# Altium PCB mounting_pcb.PcbDoc (part 2 of 2)
Units mm, origin at the board's own origin, x right, y up, seen from the top; angles counter-clockwise.
Board outline 80 x 80 mm, 2 copper layers (Top Layer, Bottom Layer), stack 0.141 mm thick; 75 components, 159 nets, 340 pads, 197 vias.
Unrouted connection lines stored in the file: 1.
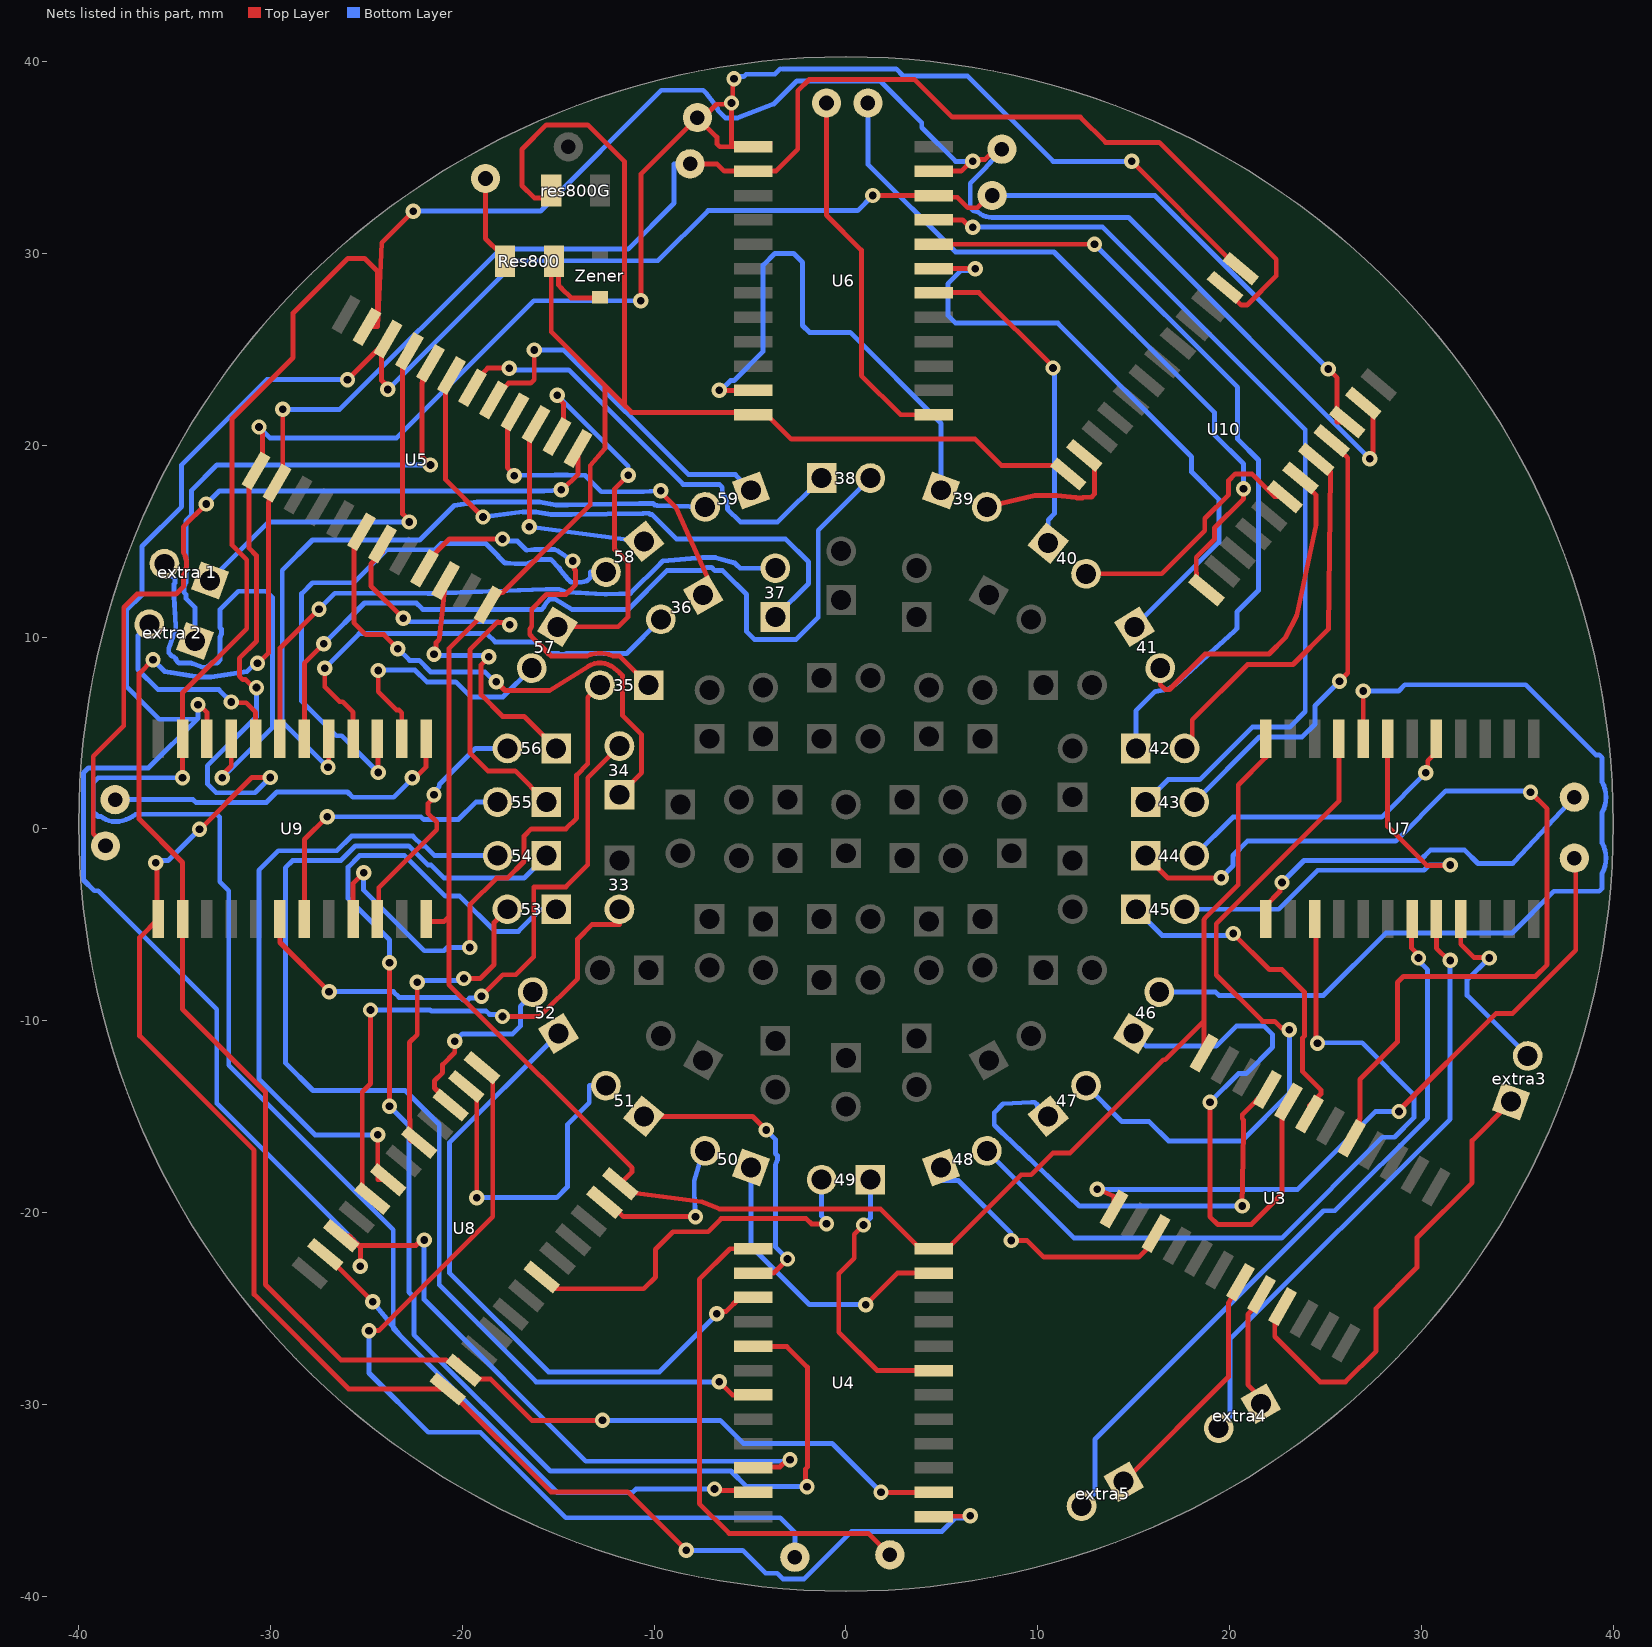
[diagram p2: the nets of this part, all layers, seen from the top]

## Via types
v1: diameter 0.8, hole 0.4, Top Layer to Bottom Layer, 197 vias

## Nets (pads, with @x,y where several pads share a name; then routed paths per layer and width w, separated by ;. In a path a pad name is that pad's centre, name@x,y a point inside that pad or via, vN(x,y) a via of type N, cw(c..) or ccw(c..) an arc to the next point about the centre after c; other vN are vias at no path point) (continued)
Net33_2: 33.2 U8.8 | length 31.6
  Top Layer w0.254: v1(-24.79,-9.442) -24.79,-13.284 -25.222,-13.716 -25.222,-18.734 U8.8@-24.69,-19.266 ; v1(-17.907,-9.779) -15.962,-9.779 -13.995,-7.812 -13.995,-5.74 -13.233,-4.978 ; 33.2@-11.811,-4.191 -11.811,-4.978 ; -13.233,-4.978 -11.811,-4.978 ; -13.233,-4.978 -11.811,-4.978 ; -13.233,-4.978 -11.811,-4.978 ; -13.233,-4.978 -11.811,-4.978
  Bottom Layer w0.254: v1(-24.79,-9.442) -21.677,-9.442 -21.619,-9.5 -18.758,-9.5 -18.583,-9.675 -18.011,-9.675 v1(-17.907,-9.779)
Net34_1: 34.1 U5.18 | length 45.3
  Top Layer w0.254: U5.18@-25.268,15.494 -25.654,15.108 -25.654,10.749 -25.031,10.126 -24.096,10.126 v1(-23.368,9.398) ; v1(-18.237,7.671) -17.78,7.214 -15.548,7.214 -15.443,7.214 ; 34.1@-11.811,1.778 -10.655,2.934 -10.655,4.915 -11.659,5.918 -11.659,8.001 -11.807,8.15 -12.09,8.384 ; -15.443,7.214 -13.442,8.472 ; -15.443,7.214 -13.442,8.472 ; -15.443,7.214 -13.442,8.472 ; -15.443,7.214 -13.442,8.472 ; -13.442,8.472 cw(c-12.827,7.493) -12.09,8.384 ; -13.442,8.472 cw(c-12.827,7.493) -12.09,8.384 ; -13.442,8.472 cw(c-12.827,7.493) -12.09,8.384 ; -13.442,8.472 cw(c-12.827,7.493) -12.09,8.384 ; -13.442,8.472 cw(c-12.827,7.493) -12.09,8.384 ; -13.442,8.472 cw(c-12.827,7.493) -12.09,8.384 ; -13.442,8.472 cw(c-12.827,7.493) -12.09,8.384 ; -13.442,8.472 cw(c-12.827,7.493) -12.09,8.384
  Bottom Layer w0.254: v1(-23.368,9.398) -22.752,8.782 -22.258,8.782 -21.661,8.185 -18.827,8.185 -18.313,7.671 v1(-18.237,7.671)
Net34_2: 34.2 U9.18 | length 30.5
  Top Layer w0.254: U9.18@-29.51,-4.7 -29.51,-5.923 v1(-26.949,-8.484) ; v1(-19.006,-8.719) -17.89,-7.603 -17.21,-7.603 -16.281,-6.674 -16.281,-3.023 -14.605,-3.023 -13.462,-1.88 -13.462,2.667 34.2@-11.811,4.318
  Bottom Layer w0.254: v1(-26.949,-8.484) -23.599,-8.484 -23.301,-8.782 -20.098,-8.782 -19.945,-8.934 -19.735,-8.934 -19.624,-8.823 -19.11,-8.823 v1(-19.006,-8.719)
Net35_1: 35.1 U5.21 | length 38
  Top Layer w0.254: U5.21@-21.968,13.589 -21.968,13.823 -20.679,15.113 v1(-17.907,15.113) ; v1(-14.252,13.965) -14.148,13.86 -14.148,13.513 -14.097,13.462 -14.097,12.725 -14.605,12.217 -15.621,12.217 -16.383,11.455 -16.383,10.563 -16.486,10.399 -16.486,10.132 -16.423,10.069 -16.383,10.029 -16.383,10.017 -15.458,9.091 -15.383,9.017 ; 35.1@-10.287,7.493 -11.737,8.943 -11.811,9.017 ; -15.383,9.017 -13.495,9.017 ; -15.383,9.017 -13.495,9.017 ; -15.383,9.017 -13.495,9.017 ; -15.383,9.017 -13.495,9.017 ; -13.495,9.017 cw(c-12.827,7.493) -12.159,9.017 ; -13.495,9.017 cw(c-12.827,7.493) -12.159,9.017 ; -13.495,9.017 cw(c-12.827,7.493) -12.159,9.017 ; -13.495,9.017 cw(c-12.827,7.493) -12.159,9.017 ; -13.495,9.017 cw(c-12.827,7.493) -12.159,9.017 ; -13.495,9.017 cw(c-12.827,7.493) -12.159,9.017 ; -13.495,9.017 cw(c-12.827,7.493) -12.159,9.017 ; -13.495,9.017 cw(c-12.827,7.493) -12.159,9.017 ; -12.159,9.017 -11.811,9.017 ; -12.159,9.017 -11.811,9.017 ; -12.159,9.017 -11.811,9.017 ; -12.159,9.017 -11.811,9.017
  Bottom Layer w0.254: v1(-17.907,15.113) -17.803,15.009 -17.135,15.009 -16.737,14.61 -16.655,14.529 -16.63,14.529 -16.255,14.56 -15.187,14.56 -15.01,14.491 v1(-14.252,13.965)
Net35_2: 35.2 U9.21 | length 28.3
  Top Layer w0.254: U9.21@-25.7,-4.7 -25.7,-2.84 v1(-25.146,-2.286) ; v1(-19.609,-6.185) -19.609,-3.962 -18.212,-2.565 -17.653,-2.565 -16.789,-1.702 -16.789,-0.381 -16.408,0 -14.605,0 -14.046,0.559 -14.046,2.801 -13.462,3.385 -13.462,6.858 35.2@-12.827,7.493
  Bottom Layer w0.254: v1(-25.146,-2.286) -25.146,-3.2 -21.99,-6.356 -20.959,-6.356 -20.788,-6.185 v1(-19.609,-6.185)
Net36_1: 36.1 U5.4 | length 17.8
  Top Layer w0.254: v1(-17.291,18.415) -17.291,18.475 -17.653,18.837 -17.653,21.345 U5.4@-17.268,21.73 ; v1(-9.652,17.632) -9.652,17.551 -8.951,16.851 -8.877,16.776 -7.215,13.077 36.1@-7.452,12.192
  Bottom Layer w0.254: v1(-17.291,18.415) -17.272,18.415 -15.163,18.453 -14.517,18.453 -13.589,18.415 -13.515,18.341 -12.751,17.577 -10.56,17.577 v1(-9.652,17.632)
Net36_2: 36.2 U9.4 | length 40.4
  Top Layer w0.254: v1(-27.178,8.382) -27.178,7.405 -26.399,6.625 -26.244,6.625 -25.7,6.081 U9.4@-25.7,4.7
  Bottom Layer w0.254: v1(-27.178,8.382) -25.381,10.179 -18.727,10.179 -18.295,9.747 -16.113,9.747 -15.585,9.218 -15.51,9.144 -14.991,9.144 -14.9,9.087 -14.633,9.087 -14.576,9.144 ; 36.2@-9.652,10.922 -11.43,9.144 ; -14.576,9.144 -13.035,9.144 ; -14.576,9.144 -13.035,9.144 ; -14.576,9.144 -13.035,9.144 ; -14.576,9.144 -13.035,9.144 ; -14.576,9.144 -13.035,9.144 ; -14.576,9.144 -13.035,9.144 ; -13.035,9.144 cw(c-12.827,7.493) -12.619,9.144 ; -13.035,9.144 cw(c-12.827,7.493) -12.619,9.144 ; -13.035,9.144 cw(c-12.827,7.493) -12.619,9.144 ; -13.035,9.144 cw(c-12.827,7.493) -12.619,9.144 ; -13.035,9.144 cw(c-12.827,7.493) -12.619,9.144 ; -13.035,9.144 cw(c-12.827,7.493) -12.619,9.144 ; -13.035,9.144 cw(c-12.827,7.493) -12.619,9.144 ; -13.035,9.144 cw(c-12.827,7.493) -12.619,9.144 ; -12.619,9.144 -11.43,9.144 ; -12.619,9.144 -11.43,9.144 ; -12.619,9.144 -11.43,9.144 ; -12.619,9.144 -11.43,9.144 ; -12.619,9.144 -11.43,9.144 ; -12.619,9.144 -11.43,9.144
Net37_1: 37.1 U5.7 | length 30
  Top Layer w0.254: U5.7@-20.568,23.635 -20.885,23.318 -20.885,18.218 v1(-18.923,16.256)
  Bottom Layer w0.254: v1(-18.923,16.256) -16.833,16.529 -16.187,16.529 -16.164,16.525 -15.37,16.383 -14.306,16.383 -10.583,16.44 -10.561,16.457 -10.269,16.457 -10.195,16.383 -10.109,16.383 -8.846,15.12 -3.157,15.12 -1.956,13.919 -1.956,12.776 37.1@-3.683,11.049
Net37_2: 37.2 U9.7 | length 32.6
  Top Layer w0.254: U9.7@-29.51,4.7 -29.51,9.423 v1(-27.478,11.455)
  Bottom Layer w0.254: v1(-27.478,11.455) -26.65,12.283 -21.806,12.283 -21.797,12.274 -21.587,12.274 -15.655,12.49 -15.652,12.493 -14.964,12.493 -14.631,12.351 -12.579,12.233 ccw(c-12.515,13.388) -12.475,12.232 -11.241,12.274 -9.663,13.853 -9.546,13.97 -7.481,14.14 -6.8,14.14 -5.788,13.856 -5.714,13.782 -5.521,13.589 37.2@-3.683,13.589
Net38_1: 38.1 U5.6 | length 30.3
  Top Layer w0.254: U5.6@-19.468,23 -19.468,23.24 -18.686,24.022 v1(-17.551,24.022)
  Bottom Layer w0.254: v1(-17.551,24.022) -17.456,23.927 -14.46,23.927 -8.491,17.958 -6.6,17.958 -6.526,17.883 -6.452,17.809 ; 38.1@-1.27,18.288 -3.556,16.002 -5.512,16.002 -6.184,16.674 ; -6.452,17.524 cw(c-7.34,16.784) -6.184,16.779 ; -6.452,17.524 cw(c-7.34,16.784) -6.184,16.779 ; -6.452,17.524 cw(c-7.34,16.784) -6.184,16.779 ; -6.452,17.524 cw(c-7.34,16.784) -6.184,16.779 ; -6.452,17.524 cw(c-7.34,16.784) -6.184,16.779 ; -6.452,17.524 cw(c-7.34,16.784) -6.184,16.779 ; -6.452,17.524 cw(c-7.34,16.784) -6.184,16.779 ; -6.452,17.524 cw(c-7.34,16.784) -6.184,16.779 ; -6.452,17.524 -6.452,17.809 ; -6.452,17.524 -6.452,17.809 ; -6.452,17.524 -6.452,17.809 ; -6.452,17.524 -6.452,17.809 ; -6.184,16.674 -6.184,16.779 ; -6.184,16.674 -6.184,16.779 ; -6.184,16.674 -6.184,16.779 ; -6.184,16.674 -6.184,16.779
Net38_2: 38.2 U9.6 | length 45
  Top Layer w0.254: U9.6@-28.24,4.7 -28.24,8.636 v1(-27.224,9.652)
  Bottom Layer w0.254: v1(-27.224,9.652) -25.101,11.775 -22.397,11.775 -22.126,11.504 -22.052,11.43 -15.877,11.43 -15.782,11.525 -15.584,11.843 -15.441,11.985 -15.174,11.985 -14.286,11.43 -11.367,11.43 -9.335,13.462 -7.564,13.462 -7.27,13.632 -7.011,13.632 -6.841,13.462 -6.426,13.462 -6.352,13.388 -5.182,12.217 -5.182,10.287 -4.775,9.881 -2.591,9.881 -1.448,11.024 -1.448,15.57 38.2@1.27,18.288
Net39_1: 39.1 U6.23 | length 28
  Top Layer w0.254: v1(-6.604,22.86) U6.23@-4.827,22.86
  Bottom Layer w0.254: v1(-6.604,22.86) -6.53,22.86 -6.015,23.375 -5.835,23.375 -4.318,24.892 -4.318,29.388 -3.708,29.997 -2.731,29.997 -2.267,29.533 -2.267,26.245 -1.905,25.883 0.214,25.883 4.953,21.143 39.1@4.953,17.653
Net39_2: 39.2 U10.23 | length 8.2
  Top Layer w0.254: 39.2@7.34,16.784 39.2@7.925,16.784 ; U10.23@12.411,19.471 12.947,18.935 12.947,17.448 12.799,17.299 12.353,17.272 12.326,17.245 12.029,17.245 11.997,17.272 10.982,17.383 9.848,17.383 8.074,16.964 39.2@7.925,16.815 ; 39.2@7.925,16.784 39.2@7.925,16.815 ; 39.2@7.925,16.784 39.2@7.925,16.815 ; 39.2@7.925,16.784 39.2@7.925,16.815 ; 39.2@7.925,16.784 39.2@7.925,16.815
Net40_1: 40.1 U6.6 | length 17.2
  Top Layer w0.254: U6.6@4.573,27.94 4.592,27.959 6.187,27.959 6.927,27.959 10.795,24.091 v1(10.795,24.028)
  Bottom Layer w0.254: 40.1@10.541,14.896 10.541,16.104 10.865,16.427 10.865,23.959 v1(10.795,24.028)
Net40_2: 40.2 U10.6 | length 13.8
  Top Layer w0.254: 40.2@12.515,13.298 16.452,13.298 18.703,15.549 18.703,16.179 19.945,17.421 19.945,18.161 20.294,18.51 21.158,18.51 22.348,17.32 U10.6@22.877,17.32
Net41_1: 41.1 U6.7 | length 32.6
  Top Layer w0.254: U6.7@4.573,29.21 v1(6.731,29.21)
  Bottom Layer w0.254: v1(6.731,29.21) 6.627,29.106 5.992,29.106 5.309,28.423 5.309,26.772 5.715,26.365 11.049,26.365 18.012,19.402 18.012,18.609 19.437,17.184 19.437,14.936 41.1@15.037,10.536
Net41_2: 41.2 U10.7 | length 17.5
  Top Layer w0.254: 41.2@16.383,8.382 16.383,7.518 16.637,7.264 16.866,7.264 18.72,9.119 22.055,9.119 22.896,9.959 23.495,11.118 24.511,15.875 24.511,17.399 23.694,18.216 U10.7@23.694,18.293
Net42_1: 42.1 U6.8 | length 41.3
  Top Layer w0.254: U6.8@4.573,30.48 v1(12.954,30.48)
  Bottom Layer w0.254: v1(12.954,30.48) 20.419,23.015 20.419,20.32 21.507,19.231 21.507,12.433 20.38,11.305 20.38,10.447 20.231,10.299 17.158,7.524 cw(c16.383,8.382) 16.571,7.241 16.129,7.168 16.055,7.094 15.113,6.152 42.1@15.113,4.191
Net42_2: 42.2 U10.8 | length 19.9
  Top Layer w0.254: 42.2@17.653,4.191 18.053,4.591 18.053,5.684 20.939,8.57 23.302,8.57 25.146,10.414 25.269,18.509 25.269,18.616 25.186,18.699 25.178,18.706 U10.8@24.51,19.266
Net43_1: 43.1 U6.9 | length 48.9
  Top Layer w0.254: U6.9@4.573,31.75 6.075,31.75 6.456,31.369 v1(6.604,31.369)
  Bottom Layer w0.254: v1(6.604,31.369) 13.386,31.369 13.46,31.295 23.941,20.814 23.941,6.121 23.128,5.309 21.184,5.309 18.44,2.565 16.789,2.565 43.1@15.621,1.397
Net43_2: 43.2 U10.9 | length 23.8
  Top Layer w0.254: U10.9@25.326,20.239 25.326,20.18 26.162,19.345 26.162,8.128 v1(25.73,7.696)
  Bottom Layer w0.254: 43.2@18.161,1.397 21.559,4.795 23.783,4.795 24.449,5.461 24.449,6.415 v1(25.73,7.696)
Net44_1: 44.1 U3.17 | length 49.4
  Top Layer w0.254: 44.1@15.621,-1.397 16.789,-2.565 19.533,-2.565 v1(19.558,-2.54) ; U3.17@26.368,-16.129 26.775,-15.722 26.775,-15.126 26.797,-15.104 26.797,-13.058 28.753,-11.102 28.753,-8.001 29.058,-7.696 35.941,-7.696 36.551,-7.087 36.551,1.041 v1(35.687,1.905)
  Bottom Layer w0.254: v1(19.558,-2.54) 20.179,-1.919 20.179,-1.386 20.93,-0.635 28.651,-0.635 31.267,1.981 35.611,1.981 v1(35.687,1.905)
Net44_2: 44.2 U7.17 | length 15.9
  Top Layer w0.254: v1(30.226,2.921) 30.33,3.025 30.33,3.55 30.78,4 U7.17@30.78,4.7
  Bottom Layer w0.254: 44.2@18.161,-1.397 20.174,0.616 27.921,0.616 v1(30.226,2.921)
Net45_1: 45.1 U3.19 | length 17.7
  Top Layer w0.254: v1(20.194,-5.458) 22.065,-7.329 22.722,-7.329 23.895,-8.503 23.895,-10.801 23.803,-10.893 23.803,-12.652 24.762,-13.611 24.762,-13.821 24.168,-14.415 U3.19@24.168,-14.859
  Bottom Layer w0.254: 45.1@15.113,-4.191 16.477,-5.555 20.097,-5.555 v1(20.194,-5.458)
Net45_2: 45.2 U7.19 | length 23.5
  Top Layer w0.254: U7.19@28.24,4.7 28.24,0.127 30.272,-1.905 31.477,-1.905 v1(31.496,-1.886)
  Bottom Layer w0.254: 45.2@17.653,-4.191 22.555,-4.191 24.587,-2.159 30.134,-2.159 30.407,-1.886 v1(31.496,-1.886)
Net46_1: 46.1 U3.20 | length 28.8
  Top Layer w0.254: v1(18.974,-14.249) 18.974,-20.218 19.38,-20.625 21.133,-20.625 22.733,-19.025 22.733,-14.559 U3.20@23.068,-14.224
  Bottom Layer w0.254: 46.1@14.986,-10.668 15.646,-11.328 19.304,-11.328 20.364,-10.268 21.786,-10.268 22.244,-10.726 22.244,-11.372 20.858,-12.759 20.464,-12.759 v1(18.974,-14.249)
Net46_2: 46.2 U7.20 | length 87.9
  Top Layer w0.254: U7.20@26.97,4.7 26.97,7.183 v1(26.975,7.188)
  Bottom Layer w0.254: 46.2@16.332,-8.514 19.278,-8.514 19.445,-8.68 24.895,-8.68 28.14,-5.436 34.722,-5.436 36.906,-3.251 39.272,-3.251 39.421,-3.102 ; v1(26.975,7.188) 28.817,7.188 29.141,7.512 35.438,7.512 39.091,3.86 39.272,3.86 39.346,3.786 cw(c39.167,3.606) 39.347,3.785 39.421,3.711 ; 39.421,-3.102 39.421,-2.317 ; 39.421,-3.102 39.421,-2.317 ; 39.421,-3.102 39.421,-2.317 ; 39.421,-3.102 39.421,-2.317 ; 39.421,-3.102 39.421,-2.318 ; 39.421,-3.102 39.421,-2.317 ; 39.421,-2.318 ccw(c37.973,-1.524) 39.421,-0.73 ; 39.421,-2.318 ccw(c37.973,-1.524) 39.421,-0.73 ; 39.421,-2.318 ccw(c37.973,-1.524) 39.421,-0.73 ; 39.421,-2.318 ccw(c37.973,-1.524) 39.421,-0.73 ; 39.421,-2.318 ccw(c37.973,-1.524) 39.421,-0.73 ; 39.421,-2.318 ccw(c37.973,-1.524) 39.421,-0.73 ; 39.421,-2.318 ccw(c37.973,-1.524) 39.421,-0.73 ; 39.421,-2.318 ccw(c37.973,-1.524) 39.421,-0.73 ; 39.421,-0.73 39.421,0.858 ; 39.421,-0.731 39.421,0.858 ; 39.421,-0.73 39.421,0.858 ; 39.421,-0.73 39.421,0.858 ; 39.421,-0.73 39.421,0.858 ; 39.421,-0.73 39.421,0.857 ; 39.421,0.857 ccw(c37.973,1.651) 39.421,2.445 ; 39.421,0.857 ccw(c37.973,1.651) 39.421,2.445 ; 39.421,0.857 ccw(c37.973,1.651) 39.421,2.445 ; 39.421,0.857 ccw(c37.973,1.651) 39.421,2.445 ; 39.421,0.857 ccw(c37.973,1.651) 39.421,2.445 ; 39.421,0.857 ccw(c37.973,1.651) 39.421,2.445 ; 39.421,0.857 ccw(c37.973,1.651) 39.421,2.445 ; 39.421,0.857 ccw(c37.973,1.651) 39.421,2.445 ; 39.421,2.445 39.421,3.711 ; 39.421,2.444 39.421,3.711 ; 39.421,2.445 39.421,3.711 ; 39.421,2.445 39.421,3.711
Net47_1: 47.1 U3.21 | length 27.3
  Top Layer w0.254: v1(20.65,-19.66) 20.72,-15.817 20.72,-15.171 20.659,-15.109 20.659,-14.899 20.733,-14.825 U3.21@21.968,-13.589
  Bottom Layer w0.254: 47.1@10.541,-14.986 47.1@9.982,-14.986 ; v1(20.65,-19.66) 12.163,-19.66 8.186,-15.894 7.728,-15.436 7.728,-14.79 8.186,-14.332 9.662,-14.249 9.833,-14.249 9.982,-14.398 ; 47.1@9.982,-14.986 9.982,-14.398 ; 47.1@9.982,-14.986 9.982,-14.398 ; 47.1@9.982,-14.986 9.982,-14.398 ; 47.1@9.982,-14.986 9.982,-14.398
Net47_2: 47.2 U7.21 | length 36.1
  Top Layer w0.254: v1(23.114,-10.477) 23.01,-10.373 22.692,-10.373 22.352,-10.033 21.72,-10.033 19.304,-7.617 19.304,-4.953 25.7,1.443 U7.21@25.7,4.7
  Bottom Layer w0.254: 47.2@12.515,-13.388 14.388,-15.26 15.806,-15.26 16.821,-16.275 20.631,-16.275 23.114,-13.792 v1(23.114,-10.477)
Net48_1: 48.1 U3.3 | length 17.2
  Top Layer w0.254: v1(8.611,-21.463) 9.449,-21.463 10.312,-22.327 15.265,-22.327 16.169,-21.423 U3.3@16.169,-21.095
  Bottom Layer w0.254: 48.1@4.953,-17.653 48.1@4.953,-18.334 ; v1(8.611,-21.463) 8.611,-21.088 5.857,-18.334 ; 48.1@4.953,-18.334 5.857,-18.334 ; 48.1@4.953,-18.334 5.857,-18.334 ; 48.1@4.953,-18.334 5.857,-18.334 ; 48.1@4.953,-18.334 5.857,-18.334
Net48_2: 48.2 U7.3 | length 40.6
  Top Layer w0.254: U7.3@24.43,-4.7 24.507,-4.777 24.507,-11.092 v1(24.584,-11.169)
  Bottom Layer w0.254: 48.2@7.34,-16.784 11.892,-21.336 22.708,-21.336 27.965,-16.078 28.594,-16.078 29.61,-15.062 29.61,-13.851 26.912,-11.154 24.599,-11.154 v1(24.584,-11.169)
Net49_1: 49.1 U4.19 | length 14.4
  Top Layer w0.254: v1(0.914,-20.65) 0.432,-21.133 0.432,-22.377 -0.381,-23.19 -0.381,-26.238 1.621,-28.24 U4.19@4.573,-28.24
  Bottom Layer w0.254: v1(0.914,-20.65) 1.27,-20.295 49.1@1.27,-18.288
Net49_2: 49.2 U8.19 | length 20
  Top Layer w0.254: U8.19@-15.856,-23.363 -15.241,-23.978 -10.541,-23.978 -9.931,-23.368 -9.931,-21.915 -9.017,-21.001 -7.191,-21.001 -6.511,-20.32 -2.069,-20.32 -1.797,-20.592 v1(-1.016,-20.593)
  Bottom Layer w0.254: 49.2@-1.27,-18.288 -1.27,-20.191 -1.016,-20.445 v1(-1.016,-20.593)
Net50_1: 50.1 U4.23 | length 15.6
  Top Layer w0.254: v1(1.029,-24.803) 2.672,-23.16 U4.23@4.573,-23.16
  Bottom Layer w0.254: 50.1@-4.953,-17.653 -4.953,-21.755 -1.905,-24.803 v1(1.029,-24.803)
Net50_2: 50.2 U8.23 | length 8.6
  Top Layer w0.254: U8.23@-12.591,-19.471 -12.358,-19.471 -11.61,-20.218 v1(-7.849,-20.218)
  Bottom Layer w0.254: v1(-7.849,-20.218) -7.912,-18.992 -7.912,-18.346 -7.488,-16.932 -7.413,-16.858 50.2@-7.34,-16.784
Net51_1: 51.1 U4.2 | length 16
  Top Layer w0.254: 51.1@-10.541,-14.986 -4.877,-14.986 v1(-4.166,-15.697) ; U4.2@-4.827,-23.16 -3.78,-23.16 v1(-3.048,-22.428)
  Bottom Layer w0.254: v1(-4.166,-15.697) -3.757,-16.105 -3.683,-16.18 -3.683,-16.928 -3.579,-17.032 -3.579,-17.257 -3.683,-17.544 -3.683,-21.793 -3.609,-21.868 v1(-3.048,-22.428)
Net51_2: 51.2 U8.2 | length 20.4
  Top Layer w0.254: U8.2@-19.792,-13.429 -19.619,-13.429 -19.253,-13.795 v1(-19.253,-19.228)
  Bottom Layer w0.254: v1(-19.253,-19.228) -15.088,-19.228 -14.529,-18.669 -14.529,-15.418 -13.386,-14.275 ; 51.2@-12.515,-13.388 -13.386,-13.388 ; -13.386,-14.275 -13.386,-13.388 ; -13.386,-14.275 -13.386,-13.388 ; -13.386,-14.275 -13.386,-13.388 ; -13.386,-14.275 -13.386,-13.388
Net52_1: 52.1 U4.3 | length 34.5
  Top Layer w0.254: v1(-6.731,-25.273) -6.627,-25.169 -6.266,-25.169 -5.527,-24.43 U4.3@-4.827,-24.43
  Bottom Layer w0.254: 52.1@-14.986,-10.668 -20.675,-16.357 -20.675,-23.149 -15.507,-28.317 -9.729,-28.317 -6.731,-25.319 v1(-6.731,-25.273)
Net52_2: 52.2 U8.3 | length 9.9
  Top Layer w0.254: U8.3@-20.608,-14.402 -20.608,-14.352 -21.452,-13.507 -21.452,-13.136 -21.031,-12.715 -21.031,-12.294 -20.396,-11.659 v1(-20.396,-11.074)
  Bottom Layer w0.254: v1(-20.396,-11.074) -20.009,-10.687 -17.374,-10.687 -16.974,-10.287 -16.974,-9.252 -16.332,-8.61 52.2@-16.332,-8.514
Net53_1: 53.1 U4.5 | length 72.4
  Top Layer w0.254: v1(-23.8,-14.453) v1(-23.8,-6.985) ; U4.5@-4.827,-26.97 U4.5@-4.088,-26.97 ; v1(-2.032,-34.29) -2.114,-34.208 -2.114,-33.382 -2.013,-33.281 -2.013,-28.061 -3.08,-26.994 U4.5@-4.088,-26.994 ; U4.5@-4.088,-26.994 U4.5@-4.088,-26.97 ; U4.5@-4.088,-26.994 U4.5@-4.088,-26.97 ; U4.5@-4.088,-26.994 U4.5@-4.088,-26.97 ; U4.5@-4.088,-26.994 U4.5@-4.088,-26.97
  Bottom Layer w0.254: v1(-23.8,-14.453) -22.784,-15.469 -22.784,-24.155 -22.53,-24.409 -22.53,-26.365 -15.418,-33.477 -5.994,-33.477 -5.182,-34.29 v1(-2.032,-34.29) ; v1(-23.8,-6.985) -23.8,-5.791 -25.959,-3.632 -25.959,-1.994 -25.361,-1.397 -23.004,-1.397 -20.895,-3.505 -20.143,-3.505 -18.301,-5.347 -17.082,-5.347 -15.926,-4.191 53.1@-15.113,-4.191
Net53_2: 53.2 U8.5 | length 16.6
  Top Layer w0.254: v1(-22.352,-8.001) -22.352,-10.724 -22.764,-11.136 -22.764,-14.823 -22.764,-15.12 -22.733,-15.151 -22.733,-16.199 -22.659,-16.273 -22.514,-16.129 -22.459,-16.129 U8.5@-22.241,-16.348 ; v1(-19.92,-7.805) -19.082,-7.805 -18.351,-7.074 -18.351,-4.889 53.2@-17.653,-4.191
  Bottom Layer w0.254: v1(-22.352,-8.001) -22.254,-7.903 -20.018,-7.903 v1(-19.92,-7.805)
Net54_1: 54.1 U4.7 | length 61.9
  Top Layer w0.254: v1(-6.604,-28.829) -5.923,-29.51 U4.7@-4.827,-29.51
  Bottom Layer w0.254: 54.1@-15.621,-1.397 -16.789,-2.565 -20.955,-2.565 -21.64,-1.88 -21.802,-1.88 -22.793,-0.889 -25.572,-0.889 -26.334,-1.651 -28.851,-1.651 -29.229,-2.029 -29.229,-12.198 -27.789,-13.638 -22.985,-13.638 -21.209,-15.415 -21.209,-23.774 -16.154,-28.829 v1(-6.604,-28.829)
Net54_2: 54.2 U8.7 | length 41.8
  Top Layer w0.254: U8.7@-23.874,-18.293 -24.409,-18.293 ; -24.409,-18.293 v1(-24.409,-15.951) ; -24.409,-18.293 v1(-24.409,-15.951) ; -24.409,-18.293 v1(-24.409,-15.951) ; -24.409,-18.293 v1(-24.409,-15.951)
  Bottom Layer w0.254: v1(-24.409,-15.951) -27.686,-15.951 -30.607,-13.03 -30.607,-2.159 -29.591,-1.143 -26.544,-1.143 -25.782,-0.381 -22.583,-0.381 -22.075,-0.889 -21.952,-0.889 -21.444,-1.397 54.2@-18.161,-1.397
Net55_1: 55.1 U5.19 | length 23.7
  Top Layer w0.254: U5.19@-24.168,14.859 -24.168,14.418 -24.765,13.821 -24.765,12.649 v1(-23.089,10.973) ; v1(-17.526,10.649) -17.63,10.753 -18.106,10.753 -18.148,10.795 -19.612,9.331 -19.612,3.965 -18.669,3.023 -17.247,3.023 55.1@-15.621,1.397
  Bottom Layer w0.254: v1(-23.089,10.973) -22.911,10.795 -18.224,10.795 v1(-17.526,10.649)
Net55_2: 55.2 U9.19 | length 15.2
  Top Layer w0.254: U9.19@-28.24,-4.7 -28.24,-0.554 v1(-27.051,0.635)
  Bottom Layer w0.254: v1(-27.051,0.635) -22.162,0.635 -22.016,0.489 -20.212,0.489 -19.304,1.397 55.2@-18.161,1.397
Net56_1: 56.1 U5.22 | length 14.1
  Top Layer w0.254: v1(-21.482,9.11) -21.378,9.215 -21.378,9.71 -21.272,9.815 -21.209,9.878 -21.195,10.004 U5.22@-20.868,12.954 ; v1(-18.618,8.966) -19.025,8.56 -19.025,6.985 -17.907,5.867 -16.789,5.867 56.1@-15.113,4.191
  Bottom Layer w0.254: v1(-21.482,9.11) -21.41,9.038 -18.69,9.038 v1(-18.618,8.966)
Net56_2: 56.2 U9.22 | length 13.1
  Top Layer w0.254: U9.22@-24.43,-4.7 -24.363,-4.633 -24.363,-3.065 -21.336,-0.039 -21.336,0.358 -21.797,0.819 -21.797,1.315 -21.482,1.63 v1(-21.482,1.778)
  Bottom Layer w0.254: v1(-21.482,1.778) -21.482,1.926 -21.209,2.199 -21.209,2.311 -19.329,4.191 56.2@-17.653,4.191
Net57_1: 57.1 U5.2 | length 20
  Top Layer w0.254: U5.2@-15.069,20.46 -14.732,20.797 -14.732,22.184 -15.062,22.514 v1(-15.062,22.606) ; 57.1@-15.037,10.536 -11.872,10.536 -11.359,11.049 -11.359,13.866 -12.065,14.572 -12.065,17.723 v1(-11.354,18.434)
  Bottom Layer w0.254: v1(-15.062,22.606) -11.354,18.898 v1(-11.354,18.434)
Net57_2: 57.2 U9.2 | length 13.3
  Top Layer w0.254: v1(-24.384,8.255) -24.384,7.151 -23.437,6.204 -23.309,6.204 -23.16,6.055 U9.2@-23.16,4.7
  Bottom Layer w0.254: v1(-24.384,8.255) -24.365,8.274 -22.469,8.274 -21.859,7.664 -20.352,7.664 -19.571,6.883 -17.882,6.883 57.2@-16.383,8.382
Net58_1: 58.1 U5.3 | length 11.5
  Top Layer w0.254: v1(-16.51,15.748) -16.51,20.753 U5.3@-16.169,21.095
  Bottom Layer w0.254: v1(-16.51,15.748) -11.363,15.072 58.1@-10.541,14.986
Net58_2: 58.2 U9.3 | length 32.1
  Top Layer w0.254: U9.3@-24.43,4.7 -24.407,4.677 -24.407,2.963 v1(-24.384,2.94)
  Bottom Layer w0.254: v1(-24.384,2.94) -26.297,4.853 -26.57,4.853 -28.378,6.661 -28.378,12.268 -27.813,12.833 -25.656,12.833 -23.935,14.554 -21.429,14.554 -21.105,14.878 -18.776,14.878 -18.142,14.244 -18.142,14.213 -17.856,13.927 -17.789,13.86 -17.694,13.854 -17.265,13.824 -16.618,13.824 -16.044,14.052 -15.397,14.052 -14.94,13.594 -14.94,13.548 -14.487,13.008 -14.339,12.859 -13.774,12.859 -13.515,12.921 -13.335,13.101 ; 58.2@-12.515,13.388 -13.335,13.388 ; -13.335,13.101 -13.335,13.388 ; -13.335,13.101 -13.335,13.388 ; -13.335,13.101 -13.335,13.388 ; -13.335,13.101 -13.335,13.388
Net59_1: 59.1 U5.5 | length 18.5
  Top Layer w0.254: U5.5@-18.368,22.365 -18.368,22.459 -17.587,23.241 -16.434,23.241 -16.256,23.419 v1(-16.256,24.968)
  Bottom Layer w0.254: v1(-16.256,24.968) -14.707,24.968 -8.204,18.466 -5.766,18.466 59.1@-4.953,17.653
Net59_2: 59.2 U9.5 | length 36.3
  Top Layer w0.254: v1(-27.009,3.209) -26.97,3.247 U9.5@-26.97,4.7
  Bottom Layer w0.254: v1(-27.009,3.209) -29.394,5.594 -29.394,13.481 -27.813,15.062 -22.225,15.062 -20.426,16.861 -20.423,16.864 -19.246,17.037 -15.976,17.037 -15.115,16.891 -14.517,16.891 -10.772,16.965 -10.058,16.965 -9.984,16.891 -9.859,16.851 59.2@-7.34,16.784
"Net82k (1)_2": 
Net333_2: 
Net800_2: 
Netextra3_1: extra3.1 U3.9 | length 24.6
  Top Layer w0.254: U3.9@22.768,-24.905 22.36,-25.312 22.36,-25.908 22.352,-25.917 22.352,-26.467 24.714,-28.829 26.035,-28.829 27.635,-27.229 27.635,-24.994 29.769,-22.86 29.769,-21.311 32.639,-18.44 32.639,-16.256 extra3.1@34.671,-14.224
Netextra3_2: extra3.2 U7.9 | length 10
  Top Layer w0.254: U7.9@32.05,-4.7 32.05,-6.015 32.747,-6.712 33.509,-6.712 v1(33.528,-6.731)
  Bottom Layer w0.254: v1(33.528,-6.731) 32.385,-7.874 32.385,-8.682 extra3.2@35.54,-11.837
Netextra4_1: extra4.1 U3.8 | length 6.3
  Top Layer w0.254: extra4.1@21.631,-29.972 21.631,-29.653 20.955,-28.977 20.955,-25.308 21.668,-24.595 U3.8@21.668,-24.27
Netextra4_2: extra4.2 U7.8 | length 31.9
  Top Layer w0.254: U7.8@30.78,-4.7 30.78,-6.218 31.42,-6.858 v1(31.496,-6.858)
  Bottom Layer w0.254: extra4.2@19.431,-31.242 20.015,-30.658 20.015,-26.619 31.496,-15.138 v1(31.496,-6.858)
Netextra5_1: extra5.1 U3.7 | length 12.8
  Top Layer w0.254: extra5.1@14.478,-34.036 19.939,-28.575 19.939,-24.724 19.973,-24.665 U3.7@20.568,-23.635
Netextra5_2: extra5.2 U7.7 | length 38.8
  Top Layer w0.254: U7.7@29.51,-4.7 29.487,-4.723 29.487,-6.225 29.845,-6.583 v1(29.845,-6.731)
  Bottom Layer w0.254: extra5.2@12.278,-35.306 12.979,-34.605 12.979,-31.826 24.893,-19.912 25.487,-19.912 30.321,-15.078 30.321,-7.355 29.845,-6.879 v1(29.845,-6.731)
"Netextra 1_1": "extra 1.1" U5.9 | length 20.8
  Top Layer w0.254: v1(-22.768,16.002) -22.768,16.077 -23.114,16.424 -23.114,24.558 U5.9@-22.768,24.905
  Bottom Layer w0.254: -33.147,12.954 -30.099,16.002 v1(-22.768,16.002)
"Netextra 1_2": "extra 1.2" U9.9 | length 30
  Top Layer w0.254: v1(-32.512,2.667) -32.512,2.815 -32.05,3.277 U9.9@-32.05,4.7
  Bottom Layer w0.254: -35.534,13.823 -35.534,13.183 ; v1(-32.512,2.667) -29.902,5.277 -29.902,12.065 -30.226,12.389 -31.68,12.389 -32.639,11.43 -32.639,10.498 -32.561,10.42 -32.561,10.195 -32.639,9.981 -32.639,8.792 -32.713,8.718 -32.788,8.643 -33.096,8.643 -33.314,8.425 -33.539,8.425 ; -35.534,13.183 -35.123,13.183 ; -35.534,13.183 -35.123,13.183 ; -35.534,13.183 -35.123,13.183 ; -35.534,13.183 -35.123,13.183 ; -35.123,13.183 -34.974,13.034 -34.974,12.823 -35.029,12.768 -35.029,12.123 -34.94,10.568 -34.94,10.418 -35.31,9.403 -35.31,9.178 -35.138,9.007 -35.039,8.971 -34.925,8.857 -34.925,8.792 -34.851,8.718 -34.776,8.643 -34.184,8.643 -34.139,8.643 -34.098,8.628 ; -34.098,8.628 cw(c-34.184,8.389) -34.096,8.628 ; -34.098,8.628 cw(c-34.184,8.389) -34.096,8.628 ; -34.098,8.628 cw(c-34.184,8.389) -34.096,8.628 ; -34.098,8.628 cw(c-34.184,8.389) -34.096,8.628 ; -34.098,8.628 cw(c-34.184,8.389) -34.096,8.628 ; -34.098,8.628 cw(c-34.184,8.389) -34.096,8.628 ; -34.098,8.628 cw(c-34.184,8.389) -34.096,8.628 ; -34.098,8.628 cw(c-34.184,8.389) -34.096,8.628 ; -34.096,8.628 -33.539,8.425 ; -34.096,8.628 -33.539,8.425 ; -34.096,8.628 -33.539,8.425 ; -34.096,8.628 -33.539,8.425
"Netextra 2_1": "extra 2.1" U5.8 | length 39
  Top Layer w0.254: U5.8@-21.668,24.27 -22.075,23.863 -22.075,23.266 -22.098,23.243 -22.098,19.406 v1(-21.666,18.974)
  Bottom Layer w0.254: -33.935,9.799 -33.935,11.532 -34.343,11.94 -34.417,12.014 -34.417,12.229 -34.521,12.333 -34.521,12.558 -34.417,12.845 ; v1(-21.666,18.974) -32.791,18.974 -34.131,17.634 -34.131,16.339 -34.417,16.053 ; -34.417,12.845 -34.417,13.524 ; -34.417,12.845 -34.417,13.524 ; -34.417,12.845 -34.417,13.524 ; -34.417,12.845 -34.417,13.524 ; -34.417,13.524 ccw(c-35.534,13.823) -34.417,14.121 ; -34.417,13.524 ccw(c-35.534,13.823) -34.417,14.121 ; -34.417,13.524 ccw(c-35.534,13.823) -34.417,14.121 ; -34.417,13.524 ccw(c-35.534,13.823) -34.417,14.121 ; -34.417,13.524 ccw(c-35.534,13.823) -34.417,14.121 ; -34.417,13.524 ccw(c-35.534,13.823) -34.417,14.121 ; -34.417,13.524 ccw(c-35.534,13.823) -34.417,14.121 ; -34.417,13.524 ccw(c-35.534,13.823) -34.417,14.121 ; -34.417,14.121 -34.417,16.053 ; -34.417,14.121 -34.417,16.053 ; -34.417,14.121 -34.417,16.053 ; -34.417,14.121 -34.417,16.053
"Netextra 2_2": "extra 2.2" U9.8 | length 11
  Top Layer w0.254: v1(-32.053,6.613) -32.013,6.573 -31.272,6.573 -30.78,6.081 U9.8@-30.78,4.7
  Bottom Layer w0.254: -36.322,10.668 -36.914,10.076 -36.914,8.311 -35.861,7.258 -32.698,7.258 v1(-32.053,6.613)
NetQ1_2: 
NetQ1_3: 
NetR1_1: 
NetR2_1: 
NetRes800_2: Res800.2 res800G.2 U3.24 U4.24 U5.24 U6.24 U7.24 U8.24 U9.24 U10.24 Zener.1 | length 220.4
  Top Layer w0.254: U9.24@-21.844,-4.826 -20.955,-4.826 -20.701,-4.572 ; U4.24@4.572,-21.844 3.827,-21.844 1.795,-19.812 -6.499,-19.812 -6.604,-19.812 -7.524,-19.439 -11.325,-18.948 -11.399,-18.874 U8.24@-11.775,-18.498 -11.684,-18.415 -11.154,-17.885 -11.154,-17.675 -20.701,-8.128 -20.701,-4.572 ; U4.24@4.573,-21.89 5.273,-21.89 9.129,-18.034 9.652,-18.034 10.795,-16.891 11.684,-16.891 16.541,-12.034 16.64,-12.034 18.669,-10.006 ; U10.24@11.595,18.498 11.145,18.948 8.103,18.948 6.731,20.32 -2.857,20.32 -4,21.463 U6.24@-4.572,21.463 ; U3.24@18.669,-11.684 18.669,-10.006 ; U7.24@21.89,4.7 21.89,3.729 20.447,2.286 20.447,-2.921 ; -20.701,-4.572 -20.701,9.396 -18.669,11.428 U5.24@-18.669,11.684 -18.669,11.686 -18.036,12.319 -17.907,12.319 -14.224,16.002 -13.335,16.891 -13.335,18.415 -13.335,18.945 -12.573,19.827 -12.573,23.114 ; -16.256,32.893 res800G.2@-15.252,32.893 ; -16.256,32.893 res800G.2@-15.252,32.893 ; -16.256,32.893 res800G.2@-15.252,32.893 ; -16.256,32.893 res800G.2@-15.252,32.893 ; -16.256,32.893 -16.891,33.528 -16.891,35.433 -15.621,36.703 -13.462,36.703 -11.557,34.798 -11.557,22.098 ; -15.367,25.908 Res800.2@-15.367,29.591 ; -15.367,25.908 Res800.2@-15.367,29.591 ; -15.367,25.908 Res800.2@-15.367,29.591 ; -15.367,25.908 Res800.2@-15.367,29.591 ; -15.367,25.908 -12.573,23.114 ; Res800.2@-15.367,29.591 Res800.2@-14.986,29.21 ; Res800.2@-15.367,29.591 Res800.2@-14.986,29.21 ; Res800.2@-15.367,29.591 Res800.2@-14.986,29.21 ; Res800.2@-15.367,29.591 Res800.2@-14.986,29.21 ; Res800.2@-14.986,29.21 -14.986,28.343 -14.837,28.194 -14.329,27.686 ; -14.329,27.686 Zener.1@-12.827,27.686 ; -14.329,27.686 Zener.1@-12.827,27.686 ; -14.329,27.686 Zener.1@-12.827,27.686 ; -14.329,27.686 Zener.1@-12.827,27.686 ; -12.573,23.114 -11.557,22.098 ; -11.557,22.098 -11.303,21.844 -11.176,21.717 -5.207,21.717 -5.08,21.59 U6.24@-4.827,21.59 U6.24@-4.572,21.59 ; U6.24@-4.572,21.463 U6.24@-4.572,21.59 ; U6.24@-4.572,21.463 U6.24@-4.572,21.59 ; U6.24@-4.572,21.463 U6.24@-4.572,21.59 ; U6.24@-4.572,21.463 U6.24@-4.572,21.59 ; 18.669,-10.006 18.669,-4.743 ; 18.669,-10.006 18.669,-4.743 ; 18.669,-10.006 18.669,-4.743 ; 18.669,-10.006 18.669,-4.743 ; 18.669,-10.006 18.669,-4.743 ; 18.669,-10.006 18.669,-4.743 ; 18.669,-4.743 ccw(c17.653,-4.191) 18.711,-4.657 ; 18.669,-4.743 ccw(c17.653,-4.191) 18.711,-4.657 ; 18.669,-4.743 ccw(c17.653,-4.191) 18.711,-4.657 ; 18.669,-4.743 ccw(c17.653,-4.191) 18.711,-4.657 ; 18.669,-4.743 ccw(c17.653,-4.191) 18.711,-4.657 ; 18.669,-4.743 ccw(c17.653,-4.191) 18.711,-4.657 ; 18.669,-4.743 ccw(c17.653,-4.191) 18.711,-4.657 ; 18.669,-4.743 ccw(c17.653,-4.191) 18.711,-4.657 ; 18.711,-4.657 20.447,-2.921 ; 18.711,-4.657 20.447,-2.921 ; 18.711,-4.657 20.447,-2.921 ; 18.711,-4.657 20.447,-2.921
NetU2_7: 
NetU3_1: pad.9 U3.1 | length 36.6
  Top Layer w0.254: v1(13.106,-18.796) 13.969,-19.15 U3.1@13.969,-19.825 ; v1(28.829,-14.732) 28.829,-14.68 33.876,-9.634 34.74,-9.634 38.047,-6.327 38.047,-1.831 pad.9@37.973,-1.524
  Bottom Layer w0.254: v1(13.106,-18.796) 23.547,-18.796 27.611,-14.732 v1(28.829,-14.732)
NetU4_1: pad.7@2.286,-37.846 U4.1 | length 26.2
  Top Layer w0.254: U4.1@-4.827,-21.89 -6.049,-21.89 -7.643,-23.484 -7.643,-35.181 -6.096,-36.728 1.168,-36.728 pad.7@2.286,-37.846
NetU4_10: pad.S0 U4.10 U5.10 U6.10 U8.10 U9.10 U10.10 | length 178.6
  Top Layer w0.254: v1(-33.782,6.477) -33.721,6.477 -33.32,6.076 U9.10@-33.32,4.7 ; v1(-25.989,23.419) U5.10@-24.218,25.19 ; v1(-25.324,-22.809) -25.321,-22.806 -25.321,-21.799 -25.403,-21.717 ; v1(-23.895,22.911) -23.895,23.059 -24.218,23.381 U5.10@-24.218,25.19 ; U5.10@-23.868,25.54 U5.10@-24.218,25.19 ; v1(-21.996,-21.438) -22.139,-21.438 -22.418,-21.717 -25.403,-21.717 ; U4.10@-4.827,-33.32 -4.777,-33.27 -3.446,-33.27 -3.069,-32.893 v1(-2.921,-32.893) ; v1(1.397,33.02) U6.10@4.573,33.02 4.663,32.93 5.805,32.93 6.35,32.385 6.849,32.385 7.484,33.02 pad.S0@7.62,33.02 ; v1(25.146,23.978) 25.603,23.52 ; U10.10@26.143,21.212 25.603,21.212 ; U8.10@-26.06,-21.438 U8.10@-26.06,-21.212 ; U8.10@-26.06,-21.438 U8.10@-26.06,-21.212 ; U8.10@-26.06,-21.438 U8.10@-26.06,-21.212 ; U8.10@-26.06,-21.438 U8.10@-26.06,-21.212 ; U8.10@-26.06,-21.438 U8.10@-25.682,-21.438 ; U8.10@-26.06,-21.212 -25.908,-21.212 U8.10@-25.682,-21.438 ; U8.10@-26.06,-21.212 U8.10@-26.323,-21.212 -25.873,-21.662 -25.506,-21.662 -25.451,-21.717 -25.403,-21.717 ; U8.10@-25.682,-21.438 -25.403,-21.717 ; 25.603,21.212 25.603,23.52 ; 25.603,21.212 25.603,23.52 ; 25.603,21.212 25.603,23.52 ; 25.603,21.212 25.603,23.52
  Bottom Layer w0.254: v1(-33.782,6.477) -33.782,5.766 -33.833,5.715 ; v1(-25.989,23.419) -30.201,23.419 -34.639,18.98 -34.639,16.796 -36.703,14.732 -36.703,12.217 -37.517,11.404 -37.517,7.43 -35.801,5.715 -33.833,5.715 ; v1(-25.324,-22.809) -25.324,-21.793 -32.803,-14.314 -32.803,-9.412 -38.989,-3.226 -39.192,-3.226 -39.751,-2.667 -39.751,2.921 -39.497,3.175 -36.373,3.175 -33.833,5.715 ; v1(-23.895,22.911) -23.868,22.911 -17.162,29.616 -9.804,29.616 -7.188,32.233 0.61,32.233 v1(1.397,33.02) ; v1(-21.996,-21.438) -21.996,-24.536 -13.564,-32.969 -2.997,-32.969 v1(-2.921,-32.893) ; pad.S0@7.62,33.02 16.104,33.02 v1(25.146,23.978)
NetU4_11: pad.S1 U4.11 U5.11 U6.11 U8.11 U9.11 U10.11 | length 254.6
  Top Layer w0.254: v1(-34.59,2.667) U9.11@-34.59,4.7 -34.59,7.091 -31.242,10.439 -31.242,14.034 -32.004,14.796 -32.004,21.393 -28.829,24.568 -28.829,26.885 -25.977,29.737 -25.089,29.737 -24.435,29.083 -24.435,26.707 U5.11@-24.955,26.187 ; U8.11@-27.139,-22.185 v1(-24.673,-24.651) ; U5.11@-24.967,26.175 U5.11@-24.955,26.187 ; v1(-22.555,32.207) -24.206,30.556 -24.385,26.705 -24.409,26.187 U5.11@-24.955,26.187 ; v1(-6.858,-34.417) -6.771,-34.503 -4.913,-34.503 U4.11@-4.827,-34.59 ; U6.11@5.08,34.29 6.008,34.29 6.516,34.798 v1(6.604,34.798) 6.708,34.902 7.254,34.902 7.784,35.433 pad.S1@8.128,35.433 ; U10.11@26.959,22.185 27.48,21.664 27.48,20.96 27.482,20.957 27.482,19.629 27.305,19.452 v1(27.305,19.304)
  Bottom Layer w0.254: v1(-34.59,2.667) -38.989,2.667 -39.243,2.413 -39.243,0.889 -39.075,0.721 -39.001,0.647 ; v1(-24.673,-24.651) -23.601,-25.986 ; v1(-22.555,32.207) -15.926,32.207 -9.627,38.506 -7.442,38.506 -7.293,38.358 -6.848,37.79 ; v1(-6.858,-34.417) -10.945,-34.417 -11.123,-34.595 -15.062,-34.595 -23.314,-26.343 ; v1(6.604,34.798) 5.715,34.798 3.948,36.565 3.948,36.819 1.778,38.989 -2.565,38.989 -3.685,37.87 -3.759,37.795 -5.646,37.065 -6.292,37.065 ; pad.S1@8.128,35.433 7.239,34.417 6.477,33.655 6.477,32.49 6.477,32.385 6.626,32.236 6.88,32.149 ; v1(27.305,19.304) 14.806,31.803 14.732,31.877 ; -39.001,0.647 -38.833,0.647 ; -39.001,0.647 -38.833,0.647 ; -39.001,0.647 -38.833,0.647 ; -39.001,0.647 -38.833,0.647 ; -39.001,0.647 -38.833,0.647 ; -38.833,0.647 ccw(c-38.1,1.524) -38.1,0.381 ; -38.833,0.647 ccw(c-38.1,1.524) -38.1,0.381 ; -38.833,0.647 ccw(c-38.1,1.524) -38.1,0.381 ; -38.833,0.647 ccw(c-38.1,1.524) -38.1,0.381 ; -38.833,0.647 ccw(c-38.1,1.524) -38.1,0.381 ; -38.833,0.647 ccw(c-38.1,1.524) -38.1,0.381 ; -38.833,0.647 ccw(c-38.1,1.524) -38.1,0.381 ; -38.833,0.647 ccw(c-38.1,1.524) -38.1,0.381 ; -38.1,0.381 ccw(c-38.1,2.019) -37.05,0.762 ; -38.1,0.381 ccw(c-38.1,2.019) -37.05,0.762 ; -38.1,0.381 ccw(c-38.1,2.019) -37.05,0.762 ; -38.1,0.381 ccw(c-38.1,2.019) -37.05,0.762 ; -38.1,0.381 ccw(c-38.1,2.019) -37.05,0.762 ; -38.1,0.381 ccw(c-38.1,2.019) -37.05,0.762 ; -38.1,0.381 ccw(c-38.1,2.019) -37.05,0.762 ; -38.1,0.381 ccw(c-38.1,2.019) -37.05,0.762 ; -37.05,0.762 -32.8,0.762 ; -37.05,0.762 -32.8,0.762 ; -37.05,0.762 -32.8,0.762 ; -37.05,0.762 -32.8,0.762 ; -37.05,0.762 -32.8,0.762 ; -37.05,0.762 -32.8,0.762 ; -32.8,0.762 -32.651,0.613 -32.651,-2.757 -32.577,-2.831 -32.182,-3.226 -32.182,-12.319 -23.601,-20.9 -23.601,-25.986 ; -23.601,-25.986 -23.601,-26.056 -23.314,-26.343 ; -23.601,-25.986 -23.314,-26.343 ; -6.848,37.79 cw(c-7.747,37.084) -6.658,37.43 ; -6.848,37.79 cw(c-7.747,37.084) -6.658,37.43 ; -6.848,37.79 cw(c-7.747,37.084) -6.658,37.43 ; -6.848,37.79 cw(c-7.747,37.084) -6.658,37.43 ; -6.848,37.79 cw(c-7.747,37.084) -6.658,37.43 ; -6.848,37.79 cw(c-7.747,37.084) -6.658,37.43 ; -6.848,37.79 cw(c-7.747,37.084) -6.658,37.43 ; -6.848,37.79 cw(c-7.747,37.084) -6.658,37.43 ; -6.658,37.43 -6.292,37.065 ; -6.658,37.43 -6.292,37.065 ; -6.658,37.43 -6.292,37.065 ; -6.658,37.43 -6.292,37.065 ; -6.658,37.43 -6.292,37.065 ; -6.658,37.43 -6.292,37.065 ; 6.88,32.149 ccw(c7.62,33.02) 7.62,31.877 ; 6.88,32.149 ccw(c7.62,33.02) 7.62,31.877 ; 6.88,32.149 ccw(c7.62,33.02) 7.62,31.877 ; 6.88,32.149 ccw(c7.62,33.02) 7.62,31.877 ; 6.88,32.149 ccw(c7.62,33.02) 7.62,31.877 ; 6.88,32.149 ccw(c7.62,33.02) 7.62,31.877 ; 6.88,32.149 ccw(c7.62,33.02) 7.62,31.877 ; 6.88,32.149 ccw(c7.62,33.02) 7.62,31.877 ; 7.62,31.877 14.732,31.877 ; 7.62,31.877 14.732,31.877 ; 7.62,31.877 14.732,31.877 ; 7.62,31.877 14.732,31.877
NetU4_13: pad.S3 U4.13 U5.13 U6.13 U8.13 U9.13 U10.13 | length 185.2
  Top Layer w0.254: v1(-35.99,-1.769) -35.925,-1.834 -35.925,-4.334 U9.13@-35.814,-4.445 ; U9.13@-35.86,-4.7 -36.83,-5.67 -36.83,-10.795 -30.861,-16.764 -30.861,-24.27 -25.931,-29.2 U8.13@-20.754,-29.2 -15.385,-34.569 -11.379,-34.569 v1(-8.331,-37.617) ; v1(-33.704,-0.019) -33.674,-0.019 -30.979,2.676 v1(-30.021,2.676) ; v1(-30.734,7.366) -30.882,7.366 -31.299,7.783 -31.443,7.783 -31.623,7.962 -31.623,8.89 -30.734,9.779 -30.734,14.244 -31.117,14.628 -31.117,18.319 -30.417,19.019 -30.417,20.617 -30.607,20.807 v1(-30.607,20.955) ; v1(-10.693,27.534) -10.693,34.138 pad.S3@-7.747,37.084 ; v1(-5.842,39.116) -5.905,39.052 -5.905,37.91 v1(-5.969,37.846) ; U4.13@4.573,-35.86 4.596,-35.837 6.454,-35.837 v1(6.477,-35.814) ; v1(14.89,34.798) 20.224,29.464 U10.13@20.32,29.464 ; U10.13@20.574,29.2 U10.13@20.295,29.2 ; pad.S3@-7.747,37.084 -7.446,37.084 -6.75,37.78 -6.035,37.78 v1(-5.969,37.846) ; pad.S3@-7.747,37.084 -6.731,36.068 -6.731,35.709 -6.582,35.56 -5.969,35.56 ; -5.969,35.56 U6.13@-5.207,35.56 ; -5.969,35.56 v1(-5.969,37.846) ; U6.13@-5.207,35.56 U6.13@-4.827,35.56 -4.127,35.56 U6.13@-3.954,35.733 ; U6.13@-5.207,35.56 U6.13@-5.034,35.733 ; U6.13@-5.034,35.733 U6.13@-3.954,35.733 ; U6.13@-5.034,35.733 U6.13@-3.954,35.733 ; U6.13@-5.034,35.733 U6.13@-3.954,35.733 ; U6.13@-5.034,35.733 U6.13@-3.954,35.733 ; U10.13@20.295,29.2 U10.13@20.295,29.464 ; U10.13@20.295,29.2 U10.13@20.295,29.464 ; U10.13@20.295,29.2 U10.13@20.295,29.464 ; U10.13@20.295,29.2 U10.13@20.295,29.464
  Bottom Layer w0.254: v1@-35.941,-1.651 -35.336,-1.651 v1(-33.704,-0.019) ; v1(-30.734,7.366) -30.734,5.842 -33.293,3.283 -33.293,2.344 -32.835,1.886 -30.811,1.886 -30.099,2.598 v1@-30.099,2.667 ; v1(-30.607,20.955) -30.023,20.371 -23.444,20.371 -16.281,27.534 v1(-10.693,27.534) ; v1(-8.331,-37.617) -5.385,-37.617 -4.191,-38.811 -3.581,-38.811 -3.277,-39.116 -2.194,-39.116 0.296,-36.627 5.004,-36.627 5.712,-35.918 6.373,-35.918 v1(6.477,-35.814) ; v1(-5.842,39.116) -5.738,39.22 -5.331,39.22 -5.207,39.345 -3.708,39.345 -3.429,39.624 ; -3.302,39.624 2.616,39.624 2.997,39.243 6.35,39.243 10.795,34.798 v1(14.89,34.798)
NetU4_14: pad.S2 U4.14 U5.14 U6.14 U8.14 U9.14 U10.14 | length 173.5
  Top Layer w0.254: v1(-36.133,8.814) -36.855,8.091 -36.855,0.513 -34.59,-1.753 U9.14@-34.59,-4.7 -34.59,-9.398 -30.264,-13.724 -30.264,-23.762 -26.34,-27.686 -20.845,-27.686 -20.754,-27.777 -20.31,-27.777 U8.14@-20.218,-27.686 ; v1(-30.683,8.636) -30.637,8.636 -30.099,9.174 -30.099,17.006 -30.075,17.031 -30.075,17.627 U5.14@-29.667,18.034 -29.362,18.562 v1(-29.362,21.869) ; v1(-12.693,-30.836) -16.383,-30.836 -18.542,-28.677 -19.402,-28.677 U8.14@-19.938,-28.227 U8.14@-20.218,-28.227 ; pad.S2@-8.128,34.671 -6.731,34.671 -6.35,34.29 -4.953,34.29 U6.14@-4.827,34.29 -3.658,34.29 -2.515,35.433 -2.515,38.481 -1.93,39.065 3.581,39.065 5.537,37.109 12.217,37.109 13.538,35.789 16.332,35.789 22.428,29.693 22.428,28.829 20.904,27.305 20.61,27.305 19.758,28.157 U10.14@19.758,28.227 ; v1(1.824,-34.59) U4.14@4.573,-34.59 ; U8.14@-20.218,-28.227 U8.14@-20.218,-27.686 ; U8.14@-20.218,-28.227 U8.14@-20.218,-27.686 ; U8.14@-20.218,-28.227 U8.14@-20.218,-27.686 ; U8.14@-20.218,-28.227 U8.14@-20.218,-27.686
  Bottom Layer w0.254: v1(-36.133,8.814) -35.529,8.21 -33.75,7.917 -33.104,7.917 -31.213,8.21 -30.786,8.636 v1(-30.683,8.636) ; v1(-29.362,21.869) -26.391,21.869 -18.034,30.226 -11.354,30.226 -8.966,32.614 ; v1(-12.693,-30.836) -6.553,-30.836 -5.353,-32.036 -0.73,-32.036 v1(1.824,-34.59) ; pad.S2@-8.128,34.671 -8.966,34.671 ; -8.966,32.614 -8.966,34.671 ; -8.966,32.614 -8.966,34.671 ; -8.966,32.614 -8.966,34.671 ; -8.966,32.614 -8.966,34.671
NetU5_1: pad.5 U5.1 | length 61.5
  Top Layer w0.254: pad.5@-38.608,-0.889 -39.243,-0.254 -39.243,3.785 -37.657,5.371 -37.657,11.543 -36.957,12.243 -34.925,12.243 -34.544,12.624 ; v1(-33.35,16.935) -34.544,15.741 ; v1(-14.84,17.672) -14.789,17.672 -13.969,18.492 U5.1@-13.969,19.825 ; -34.544,12.624 -34.544,13.226 ; -34.544,12.624 -34.544,13.226 ; -34.544,12.624 -34.544,13.226 ; -34.544,12.624 -34.544,13.226 ; -34.544,12.624 -34.544,13.226 ; -34.544,12.624 -34.544,13.226 ; -34.544,13.226 ccw(c-35.534,13.823) -34.544,14.42 ; -34.544,13.226 ccw(c-35.534,13.823) -34.544,14.42 ; -34.544,13.226 ccw(c-35.534,13.823) -34.544,14.42 ; -34.544,13.226 ccw(c-35.534,13.823) -34.544,14.42 ; -34.544,13.226 ccw(c-35.534,13.823) -34.544,14.42 ; -34.544,13.226 ccw(c-35.534,13.823) -34.544,14.42 ; -34.544,13.226 ccw(c-35.534,13.823) -34.544,14.42 ; -34.544,13.226 ccw(c-35.534,13.823) -34.544,14.42 ; -34.544,14.42 -34.544,15.741 ; -34.544,14.42 -34.544,15.741 ; -34.544,14.42 -34.544,15.741 ; -34.544,14.42 -34.544,15.741 ; -34.544,14.42 -34.544,15.741 ; -34.544,14.42 -34.544,15.741
  Bottom Layer w0.254: v1(-33.35,16.935) -32.664,17.621 -15.748,17.621 v1(-14.84,17.672)
NetU6_1: pad.2 U6.1 | length 19.6
  Top Layer w0.254: pad.2@-1.016,37.846 -1.016,31.994 0.802,30.175 0.802,23.632 2.845,21.59 U6.1@4.573,21.59
NetU7_1: pad.10 U7.1 | length 20
  Top Layer w0.254: U7.1@21.89,-4.7 21.89,-4 22.629,-3.262 22.629,-2.898 v1(22.733,-2.794)
  Bottom Layer w0.254: v1(22.733,-2.794) 23.876,-1.651 29.924,-1.651 30.47,-1.105 32.249,-1.105 32.948,-1.805 34.655,-1.805 34.76,-1.805 34.841,-1.724 pad.10@37.973,1.651
NetU8_1: pad.7@-2.667,-37.973 U8.1 | length 46.1
  Top Layer w0.254: v1(-24.867,-26.162) -24.359,-26.162 -18.415,-20.218 -18.415,-13.017 U8.1@-18.976,-12.456
  Bottom Layer w0.254: v1(-24.867,-26.162) -24.867,-28.369 -21.778,-31.457 -19.063,-31.457 -14.605,-35.916 -3.429,-35.916 -2.667,-36.678 pad.7@-2.667,-37.973
NetU9_1: pad.6 U9.1 | length 18.8
  Top Layer w0.254: v1(-22.606,2.667) -22.458,2.667 -22.07,3.055 -21.89,3.235 U9.1@-21.89,4.7
  Bottom Layer w0.254: pad.6@-38.1,1.524 -34.042,1.524 -33.896,1.378 -30.214,1.378 -29.668,1.924 -25.99,1.924 -25.717,1.651 -23.577,1.651 -22.606,2.622 v1(-22.606,2.667)
NetU10_1: pad.3 U10.1 | length 37.7
  Top Layer w0.254: U10.1@18.796,12.456 18.275,12.977 18.275,13.338 18.263,13.35 18.263,14.154 19.211,15.102 19.211,15.694 20.726,17.209 v1(20.726,17.729)
  Bottom Layer w0.254: pad.3@1.143,37.846 1.143,34.646 5.715,30.074 10.846,30.074 19.202,21.717 19.202,20.549 20.726,19.025 v1(20.726,17.729)
VCC: pad.vcc Res800.1 | length 4.4
  Top Layer w0.254: pad.vcc@-18.796,33.909 -18.796,30.769 -18.034,30.007 Res800.1@-18.034,29.845
pads on no net: U3.10 U3.11 U3.13 U3.14 U4.6 U7.10 U7.11 U7.13 U7.14 U8.6

## Polygon pours and split planes (outlines as drawn)
GND on Bottom Layer "GND_L02_P001" (solid, pour order 1): -39.5,0 ccw(c0,0) 0,-39.5 ccw(c0,0) 39.5,0 ccw(c0,0) 0,39.5 ccw(c0,0)
GND on Top Layer "GND_L01_P002" (solid, pour order 2): -39.5,0 ccw(c0,0) 0,-39.5 ccw(c0,0) 39.5,0 ccw(c0,0) 0,39.5 ccw(c0,0)

## Silkscreen, mask and mechanical layers (free items; w line width, h text height)
Top Overlay:
  text "o1+" at -3.456,38.835 h0.5
  text "o1-" at 2.513,38.835 h0.5
  text "GND" at -14.251,36.803 h0.5
  text "S3" at -9.552,36.168 h0.5
  text "S2" at -10.06,34.39 h0.5
  text "S1" at 9.244,34.39 h0.5
  text "VCC" at -21.49,32.993 h0.5
  text "S0" at 8.863,32.739 h0.5
  text "o4-" at 38.635,3.529 h0.5 r90
  text "o2-" at -38.327,3.021 h0.5 r90
  text "o2+" at -38.454,-3.456 h0.5 r90
  text "o4+" at 38.635,-4.472 h0.5 r90
  text "extra 3" at 32.706,-14.604 h0.5 r70
  text "extra 4" at 20.23,-33.391 h0.5 r30
  text "extra 5" at 11.086,-33.772 h0.5 r30
  text "o3+" at 4.853,-37.819 h0.5 r180
  text "o3-" at -3.656,-38.327 h0.5 r180